# EAGLE board fire alarm (EAGLE 9.6.2)
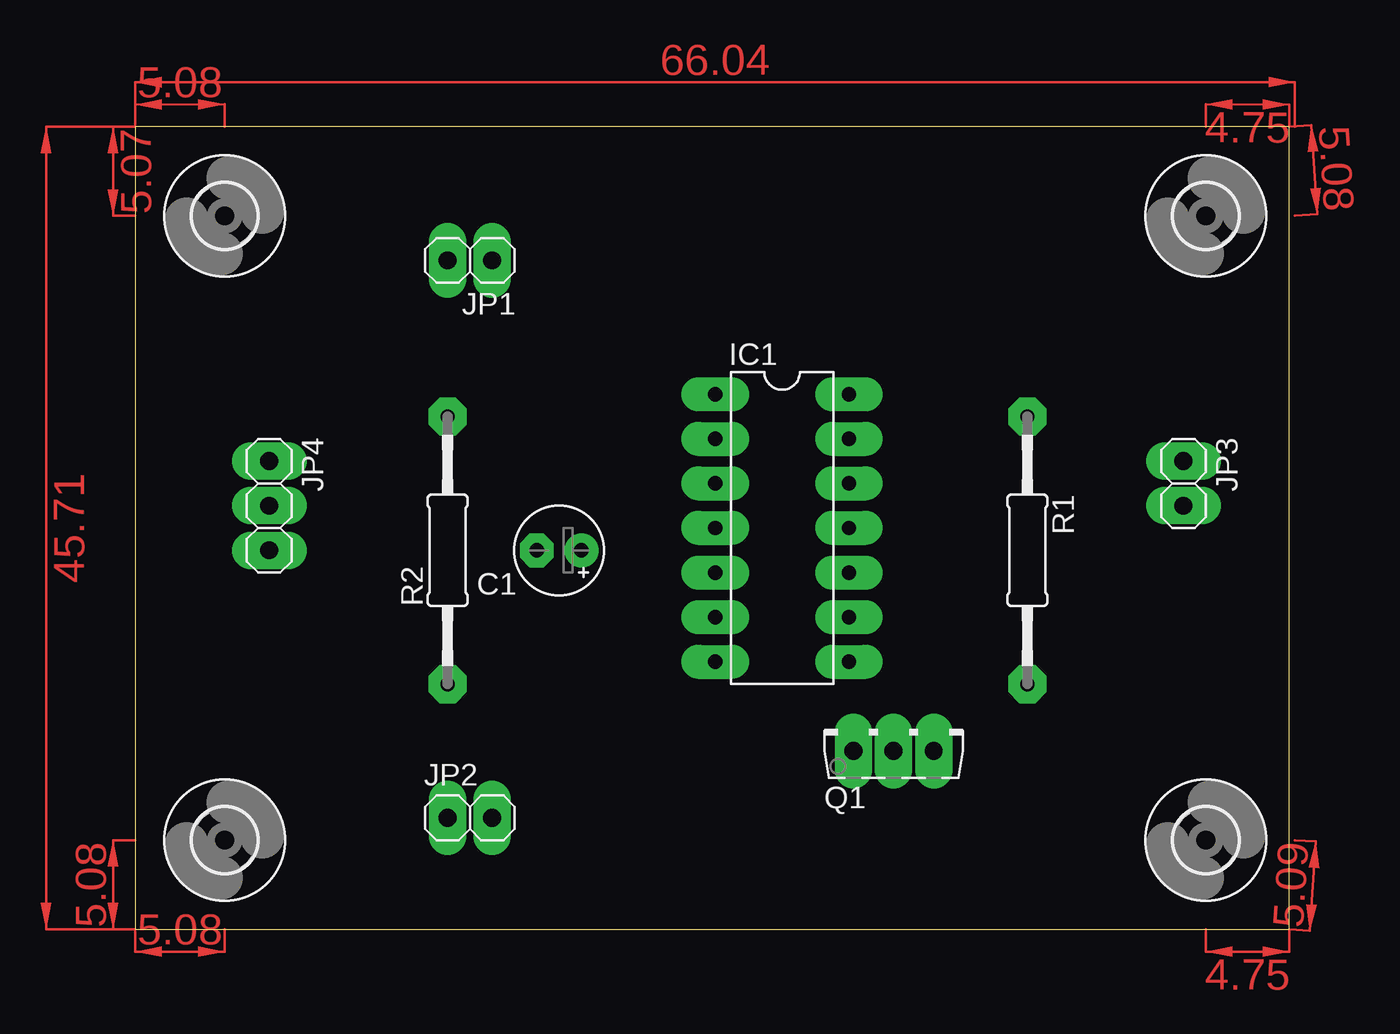
[diagram p0: board, top side]
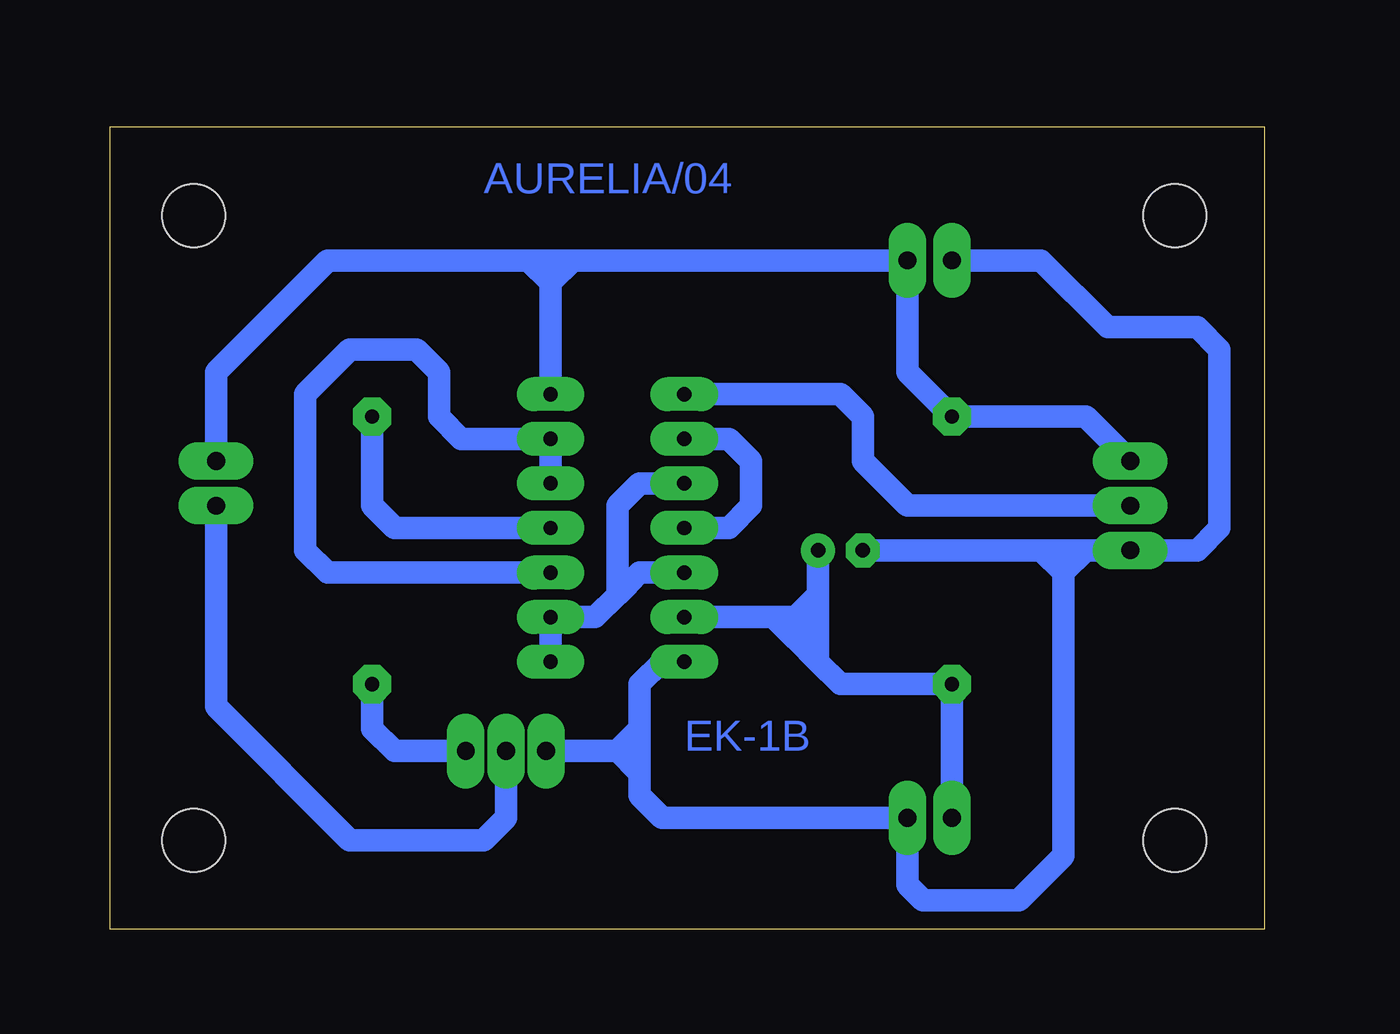
[diagram p1: board, bottom side, seen from below]

Size 65.71 x 45.71 mm. Coordinates in mm from the lower left corner, seen from the top.
Outline: 0,0 65.71,0 65.71,45.71 0,45.71 0,0
Copper layers (1*16): Top 0.035mm / dielectric 1.5mm / Bottom 0.035mm
Design rules "default *": minimum track width 6mil, minimum drill 0.35mm, track to track 6mil, track to pad 6mil, pad to pad 6mil, via to via 6mil, smd to smd 6mil, copper to edge 40mil, drill to drill 6mil, minimum pad ring 22mil, minimum via ring 10mil, stop-mask expansion 4mil, vias tented up to drill 0mil, thermal gap 10mil

## Footprints (pad centres in the part's own frame; a part is rotated, then mirrored left to right if it is on the bottom)
E2,5-5 = drill 0.813 pad 1.6: + -1.27,0 | drill 0.813 pad 1.6 octagon: - 1.27,0
3,6 = hole 3.6: 0,0
DIL14 = drill 0.813 long: 1 -7.62,-3.81; 2 -5.08,-3.81; 3 -2.54,-3.81; 4 0,-3.81; 5 2.54,-3.81; 6 5.08,-3.81; 7 7.62,-3.81; 8 7.62,3.81; 9 5.08,3.81; 10 2.54,3.81; 11 0,3.81; 12 -2.54,3.81; 13 -5.08,3.81; 14 -7.62,3.81
1X02 = drill 1.016 pad 1.93 long: 1 -1.27,0; 2 1.27,0
1X03 = drill 1.016 pad 1.93 long: 1 -2.54,0; 2 0,0; 3 2.54,0
TO126AV = drill 1.016 long: B 2.286,-1.27; C 0,-1.27; E -2.286,-1.27
0207/15 = drill 0.813 pad 2.184 octagon: 1 -7.62,0; 2 7.62,0

## Placement (x,y rotation side)
C1  [E2,5-5]  24.13,21.59 180 top
H1  MOUNT-HOLE3.6  [3,6]  5.08,40.64 0 top
H2  MOUNT-HOLE3.6  [3,6]  60.96,5.08 0 top
H3  MOUNT-HOLE3.6  [3,6]  60.96,40.64 0 top
H4  MOUNT-HOLE3.6  [3,6]  5.08,5.08 0 top
IC1  4093N  [DIL14]  36.83,22.86 270 top
JP1  [1X02]  19.05,38.1 180 top
JP2  [1X02]  19.05,6.35 0 top
JP3  [1X02]  59.69,25.4 270 top
JP4  [1X03]  7.62,24.13 270 top
Q1  BD139  [TO126AV]  43.18,11.43 0 top
R1  [0207/15]  50.8,21.59 270 top
R2  [0207/15]  17.78,21.59 90 top

## Library data of the parts
C1 = rcl; SPICEPREFIX: C
H1-H4 = holes
IC1 = 40xx
JP1-JP4 = pinhead 2
Q1 = transistor-power 2
R1 R2 = rcl; SPICEPREFIX: R

## Nets
N$1: IC1.11 R1.1
N$2: IC1.2 IC1.4
N$3: IC1.3 IC1.5 IC1.8 IC1.9
N$4: Q1.B R1.2
N$5: IC1.10 IC1.12 IC1.13
N$6: C1.+ IC1.6 JP2.1 R2.1
N$7: IC1.1 JP4.2
N$8: JP3.2 Q1.C
VDD: IC1.14 JP1.1 JP3.1 JP4.1 R2.2
VSS: C1.- IC1.7 JP1.2 JP2.2 JP4.3 Q1.E

## Tracks (layer width: path | path; a pad name or v marks a point on that pad's centre or on a via)
N$1
  Bottom 1.27: 50.8,27.94 R1.1 50.8,24.13 49.53,22.86 IC1.11
N$2
  Bottom 1.27: IC1.2 30.48,27.94 29.21,26.67 29.21,24.13 30.48,22.86 IC1.4
N$3
  Bottom 1.27: IC1.5 35.56,20.32 36.2,19.69 | 36.2,19.69 36.83,19.05 | IC1.8 IC1.9 38.1,17.78 36.83,19.05 | IC1.3 35.56,25.4 36.83,24.13 36.83,20.32 | 36.83,20.32 36.2,19.69 | 36.83,20.32 36.83,19.05
N$4
  Bottom 1.27: Q1.B 49.53,10.16 50.8,11.43 R1.2
N$5
  Bottom 1.27: IC1.12 IC1.13 45.72,27.94 46.99,29.21 46.99,31.75 48.26,33.02 52.07,33.02 54.61,30.48 54.61,21.59 53.34,20.32 IC1.10
N$6
  Bottom 1.27: JP2.1 R2.1 24.13,13.97 25.4,15.24 | IC1.6 27.94,17.78 | 27.94,17.78 26.67,17.78 | 26.67,17.78 25.4,19.05 | 25.4,19.05 C1.+ | 25.4,15.24 25.4,19.05 | 27.94,17.78 26.67,16.51 | 26.67,16.51 25.4,15.24 | 26.67,17.78 26.67,16.51
N$7
  Bottom 1.27: JP4.2 20.32,24.13 22.86,26.67 22.86,29.21 24.13,30.48 IC1.1
N$8
  Bottom 1.27: JP3.2 59.69,12.7 52.07,5.08 44.45,5.08 43.18,6.35 Q1.C
VDD
  Bottom 1.27: 39.37,38.1 JP1.1 20.32,31.75 R2.2 10.16,29.21 JP4.1 | 39.37,38.1 40.64,38.1 | 40.64,38.1 41.91,38.1 | 41.91,38.1 53.34,38.1 59.69,31.75 JP3.1 | IC1.14 40.64,36.83 | 40.64,36.83 40.64,38.1 | 41.91,38.1 40.64,36.83 | 39.37,38.1 40.64,36.83
VSS
  Bottom 1.27: JP1.2 12.7,38.1 8.89,34.29 3.81,34.29 2.54,33.02 2.54,22.86 3.81,21.59 JP4.3 | 8.89,21.59 JP4.3 | C1.- 12.7,21.59 | 12.7,21.59 11.43,21.59 | 11.43,21.59 10.16,21.59 | 10.16,21.59 JP4.3 | 11.43,21.59 11.43,20.32 | 11.43,20.32 11.43,4.19 13.97,1.65 19.43,1.65 20.32,2.54 JP2.2 34.29,6.35 35.56,7.62 35.56,8.89 | 10.16,21.59 11.43,20.32 | 11.43,20.32 12.7,21.59 | IC1.7 34.29,15.24 35.56,13.97 35.56,11.43 | 35.56,11.43 36.83,10.16 | Q1.E 36.83,10.16 | 36.83,10.16 35.56,8.89 | 35.56,11.43 35.56,8.89
(copper drawn outside any net)
  shapes: Top area x10

## Text on the board
Bottom: AURELIA/04 | EK-1B